# Altium PCB stm32_buck_PCB1.PcbDoc
Units mm, origin at the board's own origin, x right, y up, seen from the top; angles counter-clockwise.
Board outline 152.4 x 101.6 mm, 2 copper layers (Top Layer, Bottom Layer); 87 components, 52 nets, 386 pads, 168 vias.
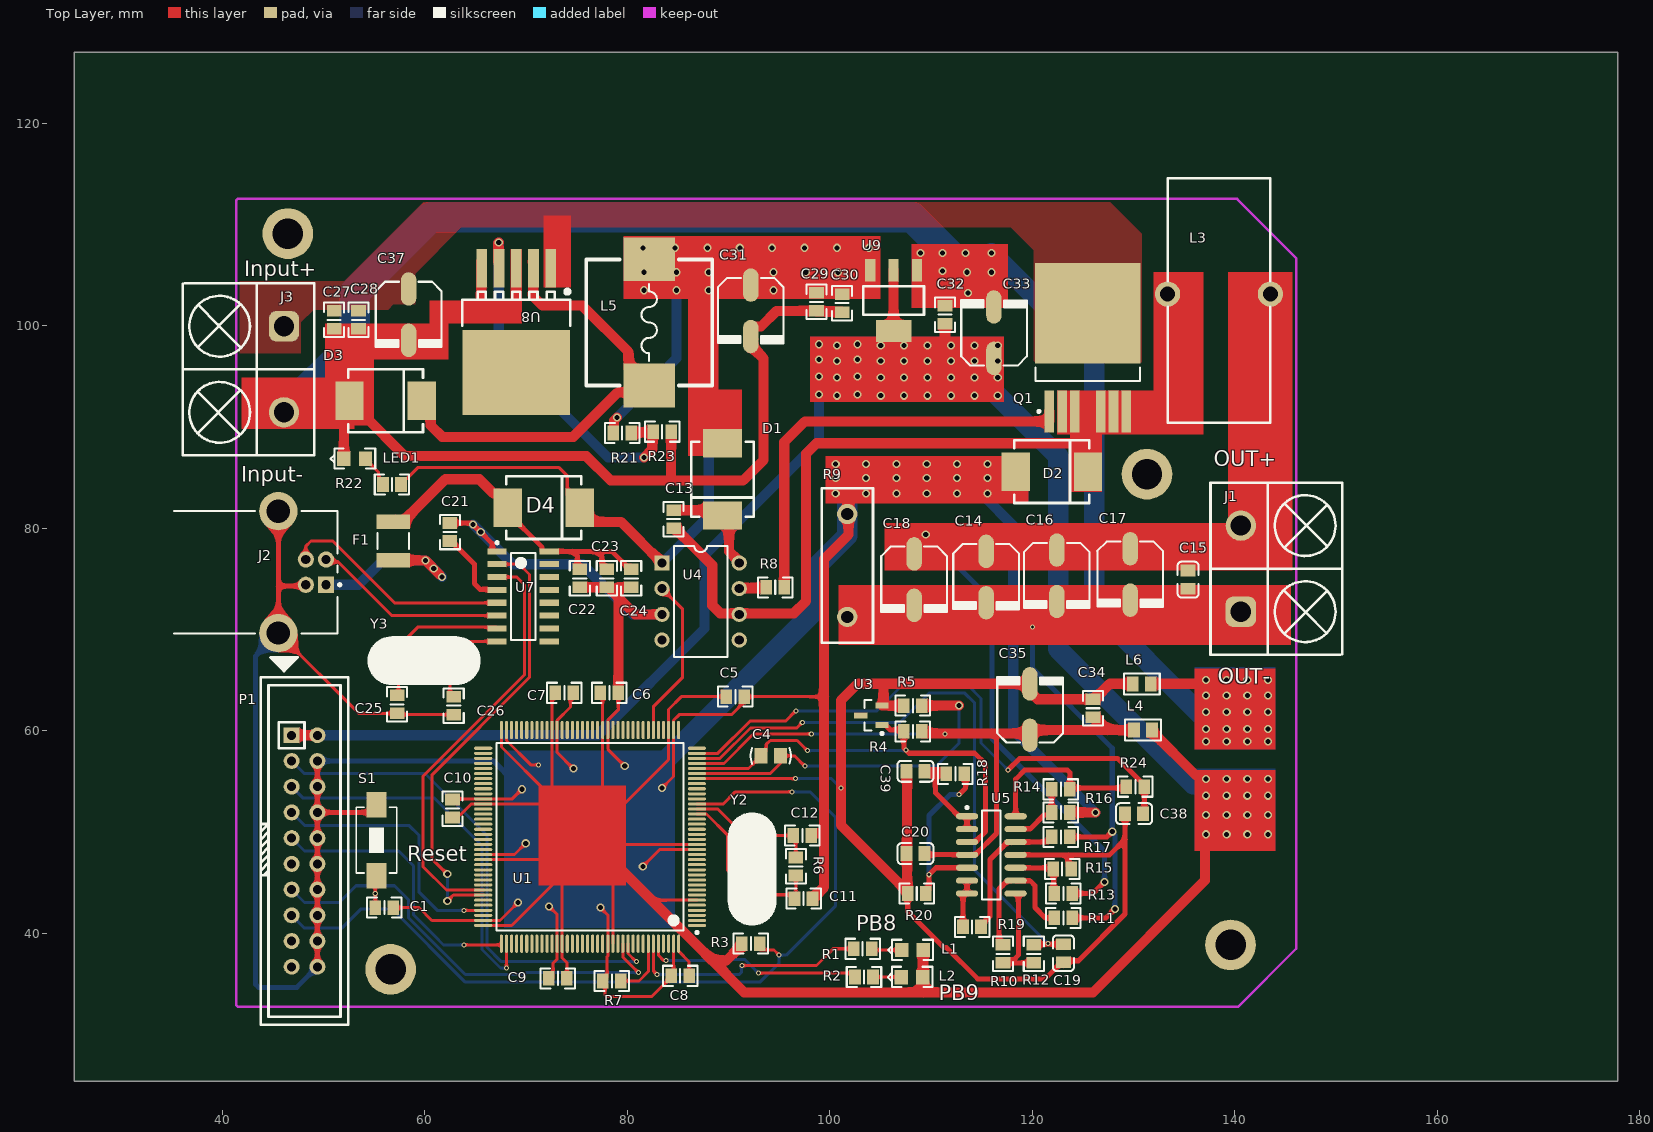
[diagram p0: Top Layer view]
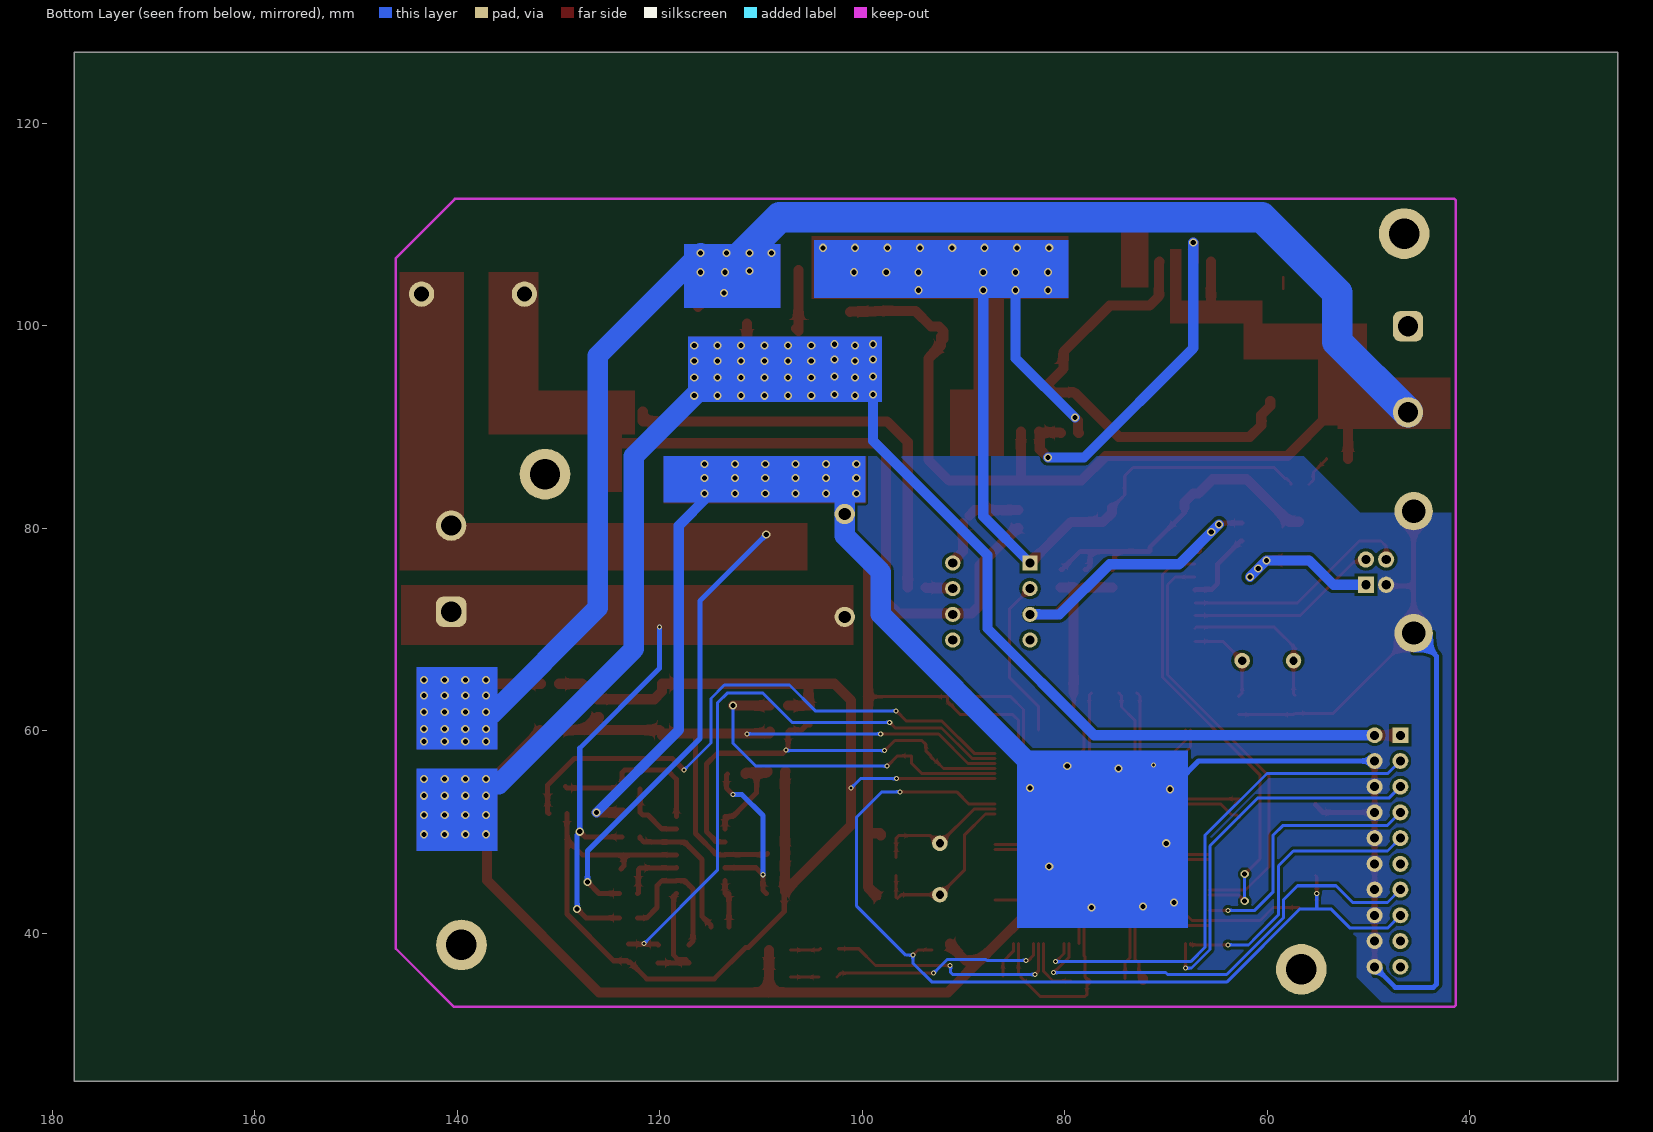
[diagram p1: Bottom Layer view, seen from below]
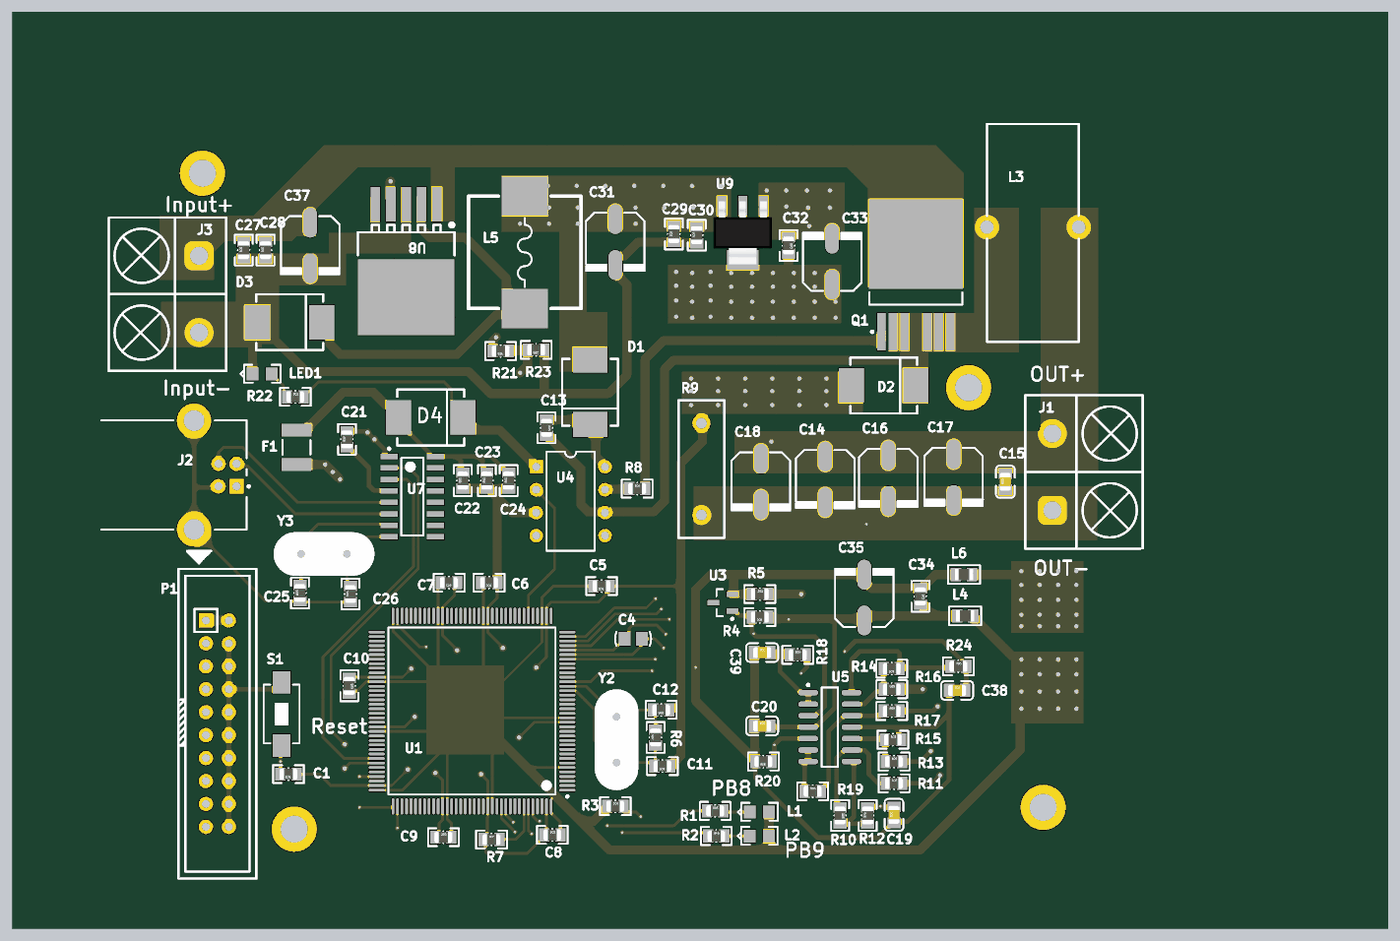
[diagram p2: 3D render of the assembled board from above, using the file's embedded part models]

## Layer stack, top to bottom
Top Solder: solder mask 0.0102, Solder Resist, Dk 3.5
Top Layer: signal copper 0.0356
Dielectric 1: dielectric 0.32, FR-4, Dk 4.8
Bottom Layer: signal copper 0.0356
Bottom Solder: solder mask 0.0102, Solder Resist, Dk 3.5

## Board outline
25.4,25.4 177.8,25.4 177.8,127 25.4,127

## Design rules (kind name [scope] priority, off if disabled: settings)
Clearance [All] p1: gap=0.2 ignorepadtopadclearanceinfootprint=FALSE
HoleSize [All] p1: absolutevalues=TRUE maxlimit=3 minlimit=0.025 maxpercent=80.000 minpercent=20.000
MinimumSolderMaskSliver [All] p1: minsoldermaskwidth=0.1
PlaneConnect [All] p1: planeconnectstyle=Direct reliefexpansion=0.508 reliefentries=4 reliefconductorwidth=0.254 reliefairgap=0.254
PolygonConnect [All] p1: connectstyle=Direct reliefconductorwidth=0.254 reliefentries=4 polygonreliefangle="90 Angle" airgapwidth=0.254
RoutingVias [All] p1: holewidth=0.711 width=1.27 viastyle="Through Hole" minholewidth=0.711 minwidth=1.27 maxholewidth=0.711 maxwidth=1.27
SolderMaskExpansion [All] p1: expansion=0.102
Width [All] p1: maxlimit=3 minlimit=0.254 preferedwidth=0.254
27 further rules are at their usual default settings.

## Classes and differential pairs
component class 辅助电源: C21 C22 C23 C24 C25 C26 C27 C28 C29 C30 C31 C32 C33 C34 C35 C37 D3 D4 F1 J2 J3 L4 L5 L6 LED1 R21 R22 R23 U7 U8 U9 Y3
component class 主电路: C13 C14 C15 C16 C17 C18 C19 C20 C38 C39 D1 D2 J1 L3 Q1 R8 R9 R10 R11 R12 R13 R14 R15 R16 R17 R18 R19 R20 R24 U4 U5
component class STM32: C1 C4 C5 C6 C7 C8 C9 C10 C11 C12 L1 L2 P1 R1 R2 R3 R4 R5 R6 R7 S1 U1 U3 Y2

## Components (designator, comment, footprint, x,y, rotation, side; value= is the part's Value field where it differs from the comment)
C1 "0.1uf" 0805R 56.007,42.545 r180 top
C4 "100nF" C-RAD-0805 94.168,57.531 r180 top
C5 "0.1uf" 0805 90.678,63.373 r180 top
C6 "0.1uf" 0805 78.232,63.754 r180 top
C7 "0.1uf" 0805 73.787,63.754 r180 top
C8 "0.1uf" 0805 85.217,35.814 r0 top
C9 "0.1uf" 0805 73.152,35.56 r0 top
C10 "0.1uf" 0805 62.738,52.324 r270 top
C11 "22pF" 0805R 97.409,43.434 r180 top
C12 "22pF" 0805R 97.282,49.657 r180 top
C13 "1uF" 0805R 84.582,80.899 r270 top
C14 "Cap Pol1" RB-220T 115.443,75.184 r270 top value=470uF
C15 "100nF" 0805_C 135.382,74.931 r90 top
C16 "Cap Pol1" RB-220T 122.428,75.311 r270 top value=470uF
C17 "Cap Pol1" RB-220T 129.667,75.438 r270 top value=470uF
C18 "Cap Pol1" RB-220T 108.331,74.93 r270 top value=470uF
C19 "33nF" 0805_C 123.063,38.04 r90 top
C20 "100nF" 0805_C 108.458,47.879 r0 top
C21 "0.1uf" 0805 62.484,79.629 r90 top
C22 "10uf" 0805 75.311,75.057 r90 top
C23 "0.1uf" 0805 77.978,75.057 r90 top
C24 "10uf" 0805 80.391,75.057 r90 top
C25 "22pF" 0805R 57.277,62.611 r90 top
C26 "22pF" 0805R 62.865,62.484 r90 top
C27 "10uf" 0805 51.054,100.584 r90 top
C28 "0.1uf" 0805 53.467,100.584 r90 top
C29 "0.1uf" 0805 98.679,102.362 r90 top
C30 "10uf" 0805 101.219,102.235 r90 top
C31 "220μF" RB-220T 92.202,101.473 r270 top
C32 "0.1uf" 0805 111.379,101.092 r270 top
C33 "Cap Pol1" RB-220T 116.205,99.314 r90 top value=470uF
C34 "0.1uf" 0805 125.984,62.23 r270 top
C35 "Cap Pol1" RB-220T 119.761,62.103 r90 top value=470uF
C37 "Cap Pol1" RB-220T 58.42,101.092 r270 top value=470uF
C38 "33nF" 0805_C 130.047,51.816 r0 top
C39 "100nF" 0805_C 108.459,56.007 r0 top
D1 "SS36" SMC(DO-214AB)_S1 89.408,84.836 r90 top
D2 "SF10A600H" SMC(DO-214AB)_S1 121.92,85.598 r180 top
D3 "SS36" SMC(DO-214AB)_S1 56.134,92.583 r180 top
D4 "SS36" SMC(DO-214AB)_S1 71.755,82.042 r180 top
F1 "500mA" 1812 56.896,78.74 r90 top
J1 "Heard2" 8.5端子 140.589,71.764 r90 top
J2 "1-1470156-2" 1-1470156 35.25,75.672 r180 top
J3 "Heard2" 8.5端子 46.101,99.949 r270 top
L1 "POWER" LED-0805 108.153,38.354 r180 top value=红色,0805
L2 "POWER" LED-0805 108.128,35.687 r180 top value=红色,0805
L3 "12uH" L_12uh 133.35,103.124 r0 top
L4 "10uH ±10%" 0805_L 130.937,60.071 r180 top
L5 "INDUCTOR1" L-12X12S 82.169,100.33 r90 top value=470uH
L6 "10uH ±10%" 0805_L 130.811,64.643 r180 top
LED1 "POWER" LED-0805 53.086,86.868 r180 top value=红色,0805
P1 "JTAG/SWD" JTAG_20 46.863,59.563 r0 top locked
Q1 "BUK6C3R3-75C" NXP-SOT427_N 125.476,97.79 r90 top
R1 "1.5k" 0805R 103.251,38.481 r0 top
R2 "1.5k" 0805R 103.378,35.687 r0 top
R3 "10K" 0805R 92.202,38.989 r0 top
R4 "4.7K" 0805R 108.204,59.944 r180 top
R5 "0Ω" 0805R 108.204,62.484 r0 top
R6 "1M" 0805R 96.647,46.609 r90 top
R7 "100k" 0805R 78.486,35.306 r0 top
R8 "100" 0805R 94.615,74.168 r0 top
R9 "0.01" 水泥电阻 101.727,81.407 r270 top
R10 "1K" 0805R 117.094,37.973 r270 top
R11 "30K" 0805R 123.063,41.529 r0 top
R12 "1K" 0805R 120.142,37.973 r90 top
R13 "30K" 0805R 123.063,43.942 r0 top
R14 "15K" 0805R 122.809,54.229 r180 top
R15 "1K" 0805R 122.936,46.355 r0 top
R16 "1K" 0805R 122.809,51.943 r0 top
R17 "1K" 0805R 122.809,49.53 r0 top
R18 "10K" 0805R 112.395,55.753 r0 top
R19 "15K" 0805R 114.046,40.64 r0 top
R20 "10K" 0805R 108.585,43.942 r180 top
R21 "30K" 0805R 79.502,89.408 r180 top
R22 "3.3K" 0805R 56.769,84.328 r0 top
R23 "4.7K" 0805R 83.439,89.535 r180 top
R24 "1K" 0805R 130.175,54.483 r0 top
S1 "SW-PB" SW_PB2_A1 55.245,49.149 r0 top
U1 "STM32F103ZET6" STM-LQFP144_N 76.327,49.53 r180 top
U3 "LM385M3-2.5" MF03A_N 104.106,61.534 r180 top
U4 "IR2117" PDIP8 87.249,72.771 r270 top
U5 "TLV2374IDR" TI-D14_N 115.951,47.752 r0 top
U7 "CH340" SOIC-16 69.723,73.279 r0 top
U8 "LM2596S" TO-263-5 69.039,105.664 r90 top
U9 "AMS1117-3.3" SOT-223 106.299,102.489 r90 top
Y2 "8M" 晶振 92.329,46.355 r90 top
Y3 "12M" 晶振 59.944,66.929 r0 top

## Footprints (in the part's own frame and the unit in brackets; to place one, negate y for a bottom-side part, rotate by r counter-clockwise, add the part's x,y. Pads: shape width x height; smd on the part's side, far side on the other; paste and mask are expansions set on the pad)
1-1470156 [mm] "Connector; USB1.1, Type B, Thru-Hole; 4 Position; Right Angle"
  rect 1.6x1.6 hole 0.92: 1(-15.01,1.25)
  round 1.6 hole 0.92: 2(-15.01,-1.25) 3(-13.01,-1.25) 4(-13.01,1.25)
  round 3.8 hole 2.3: 5(-10.3,6.02) 6(-10.3,-6.02)
  silkscreen extent -16.49,-6.05 -0.02,6.05
8.5端子 [mm]
  rrect50% 3x3 hole 2: 1(0,0)
  round 3 hole 2: 2(8.5,0)
  silkscreen extent -4.25,-10 12.75,3
0805 [mm]
  rect 1.15x1.45 smd: 1(-0.889,0) 2(0.889,0)
  silkscreen extent -1.7,-0.99 1.7,0.99, body extent -1,-0.63 1,0.63, height 0.78
0805_C [mm]
  rect 1.16x1.47 smd: 1(-0.89,0) 2(0.89,0)
  silkscreen extent -1.77,-1.04 1.77,1.04, body extent -1,-0.62 1,0.63, height 0.77
0805_L [mm]
  rect 1.16x1.47 smd: 1(-0.89,0) 2(0.89,0)
  silkscreen extent -1.77,-1.04 1.77,1.03, body extent -1.02,-0.64 1.03,0.64, height 0.6
0805R [mm]
  rect 1.15x1.45 smd: 1(-0.889,0) 2(0.889,0)
  silkscreen extent -1.7,-0.99 1.7,0.99, body extent -1,-0.63 1,0.63, height 0.78
1812 [mm] "Chip Capacitor, Body 4.5x3.2mm, IPC High Density"
  rect 1.4x3.3 smd: 1(-1.9,0) 2(1.9,0)
  silkscreen extent -0.8,-1.55 0.8,1.55, body extent -2.4,-1.7 2.4,1.7, height 1.4
C-RAD-0805 [mm] "贴片电容"
  rect 1.3x1.5 smd: 1(-0.95,0) 2(0.95,0)
  silkscreen extent -2,-0.79 2,0.79, body extent -1.27,-0.64 1.27,0.64, height 0.9
JTAG_20 [mm]
  rect 1.575x1.575 hole 0.889: 1(0,0)
  round 1.575 hole 0.889: 2(2.54,0) 3(0,-2.54) 4(2.54,-2.54) 5(0,-5.08) 6(2.54,-5.08) 7(0,-7.62) 8(2.54,-7.62) 9(0,-10.16) 10(2.54,-10.16) 11(0,-12.7) 12(2.54,-12.7) 13(0,-15.24) 14(2.54,-15.24) 15(0,-17.78) 16(2.54,-17.78) 17(0,-20.32) 18(2.54,-20.32) 19(0,-22.86) 20(2.54,-22.86)
  silkscreen extent -3.05,-28.57 5.59,7.69
L-12X12S [mil]
  rect 170x200 smd: 1(-245,0) 2(245,0)
  Top Layer pour cut-out: -245.5,-245 -245.5,247 245.5,247 245.5,-245
  silkscreen extent -245,-245 245,245
L_12uh [mm] "24*9.5mm"
  round 2.5 hole 1.5: 1(0,0) 2(10.16,0)
  silkscreen extent 0,-12.7 10.16,11.43
LED-0805 [mil]
  rect 52x56 smd: 1(-42,0) 2(42,0)
  silkscreen extent -80,-40 94,38, body extent -60,-25 60,25, height 50
MF03A_N [mm] "SOT23, 3-Leads, Body 2.9x1.3mm, Pitch 0.95mm, Lead Span 2.4mm, IPC Medium Density"
  rect 1.3x0.6 smd: 1(-1.05,0.95) 2(-1.05,-0.95) 3(1.05,0)
  silkscreen extent -1.18,-1.5 0.7,1.92, body extent -0.7,-1.5 0.7,1.5, height 1.12
NXP-SOT427_N [mm] "D2-PAK, 7-Leads, Body 9.80x10.30mm, IPC Medium Density"
  rect 4.15x0.95 smd: 1(-6.25,3.81) 2(-6.25,2.54) 3(-6.25,1.27) 5(-6.25,-1.27) 6(-6.25,-2.54) 7(-6.25,-3.81)
  rect 9.9x10.4 smd: 8(3.45,0)
  silkscreen extent -6.37,-5.15 -1.9,5.15, body extent -3.25,-5.15 6.55,5.15, height 4.5
PDIP8 [mm] "DIP; 8 Leads; Row Spacing 7.62 mm; Pitch 2.54 mm"
  rect 1.5x1.5 hole 0.9: 1(-3.81,-3.81)
  round 1.5 hole 0.9: 2(-1.27,-3.81) 3(1.27,-3.81) 4(3.81,-3.81) 5(3.81,3.81) 6(1.27,3.81) 7(-1.27,3.81) 8(-3.81,3.81)
  silkscreen extent -5.5,-2.65 5.5,2.65
RB-220T [mil]
  oval 130x60 smd: 1(-100,0) 2(100,0)
  silkscreen extent -128,-128 126,127
SMC(DO-214AB)_S1 [mil]
  rect 110x150 smd: 1(140.49,0) 2(-140.49,0)
  silkscreen extent -146,-122 146,122
SOIC-16 [mm] "USB转串口"
  rect 1.9x0.6 smd: 1(-2.575,4.445) 2(-2.575,3.175) 3(-2.575,1.905) 4(-2.575,0.635) 5(-2.575,-0.635) 6(-2.575,-1.905) 7(-2.575,-3.175) 8(-2.575,-4.445) 9(2.575,-4.445) 10(2.575,-3.175) 11(2.575,-1.905) 12(2.575,-0.635) 13(2.575,0.635) 14(2.575,1.905) 15(2.575,3.175) 16(2.575,4.445)
  silkscreen extent -2.7,-4.3 1.22,5.42, body extent -1.98,-4.28 1.97,4.28, height 1.7
SOT-223 [mm]
  rect 2.2x1 smd: 1(3,-2.3) 2(3,0) 3(3,2.3)
  rect 2.2x3.5 smd: 2(-3,0)
  silkscreen extent -1.4,-3 1.4,3, body extent -3.49,-3.24 3.49,3.24, height 1.64
STM-LQFP144_N [mm] "Thin QFP, 144-Leads, Body 20x20mm, Pitch 0.5mm, IPC Medium Density"
  oval 1.8x0.3 smd: 1(-10.55,8.75) 2(-10.55,8.25) 3(-10.55,7.75) 4(-10.55,7.25) 5(-10.55,6.75) 6(-10.55,6.25) 7(-10.55,5.75) 8(-10.55,5.25) 9(-10.55,4.75) 10(-10.55,4.25) 11(-10.55,3.75) 12(-10.55,3.25) 13(-10.55,2.75) 14(-10.55,2.25) 15(-10.55,1.75) 16(-10.55,1.25) 17(-10.55,0.75) 18(-10.55,0.25) 19(-10.55,-0.25) 20(-10.55,-0.75) 21(-10.55,-1.25) 22(-10.55,-1.75) 23(-10.55,-2.25) 24(-10.55,-2.75) 25(-10.55,-3.25) 26(-10.55,-3.75) 27(-10.55,-4.25) 28(-10.55,-4.75) 29(-10.55,-5.25) 30(-10.55,-5.75) 31(-10.55,-6.25) 32(-10.55,-6.75) 33(-10.55,-7.25) 34(-10.55,-7.75) 35(-10.55,-8.25) 36(-10.55,-8.75) 73(10.55,-8.75) 74(10.55,-8.25) 75(10.55,-7.75) 76(10.55,-7.25) 77(10.55,-6.75) 78(10.55,-6.25) 79(10.55,-5.75) 80(10.55,-5.25) 81(10.55,-4.75) 82(10.55,-4.25) 83(10.55,-3.75) 84(10.55,-3.25) 85(10.55,-2.75) 86(10.55,-2.25) 87(10.55,-1.75) 88(10.55,-1.25) 89(10.55,-0.75) 90(10.55,-0.25) 91(10.55,0.25) 92(10.55,0.75) 93(10.55,1.25) 94(10.55,1.75) 95(10.55,2.25) 96(10.55,2.75) 97(10.55,3.25) 98(10.55,3.75) 99(10.55,4.25) 100(10.55,4.75) 101(10.55,5.25) 102(10.55,5.75) 103(10.55,6.25) 104(10.55,6.75) 105(10.55,7.25) 106(10.55,7.75) 107(10.55,8.25) 108(10.55,8.75)
  oval 0.3x1.8 smd: 37(-8.75,-10.55) 38(-8.25,-10.55) 39(-7.75,-10.55) 40(-7.25,-10.55) 41(-6.75,-10.55) 42(-6.25,-10.55) 43(-5.75,-10.55) 44(-5.25,-10.55) 45(-4.75,-10.55) 46(-4.25,-10.55) 47(-3.75,-10.55) 48(-3.25,-10.55) 49(-2.75,-10.55) 50(-2.25,-10.55) 51(-1.75,-10.55) 52(-1.25,-10.55) 53(-0.75,-10.55) 54(-0.25,-10.55) 55(0.25,-10.55) 56(0.75,-10.55) 57(1.25,-10.55) 58(1.75,-10.55) 59(2.25,-10.55) 60(2.75,-10.55) 61(3.25,-10.55) 62(3.75,-10.55) 63(4.25,-10.55) 64(4.75,-10.55) 65(5.25,-10.55) 66(5.75,-10.55) 67(6.25,-10.55) 68(6.75,-10.55) 69(7.25,-10.55) 70(7.75,-10.55) 71(8.25,-10.55) 72(8.75,-10.55) 109(8.75,10.55) 110(8.25,10.55) 111(7.75,10.55) 112(7.25,10.55) 113(6.75,10.55) 114(6.25,10.55) 115(5.75,10.55) 116(5.25,10.55) 117(4.75,10.55) 118(4.25,10.55) 119(3.75,10.55) 120(3.25,10.55) 121(2.75,10.55) 122(2.25,10.55) 123(1.75,10.55) 124(1.25,10.55) 125(0.75,10.55) 126(0.25,10.55) 127(-0.25,10.55) 128(-0.75,10.55) 129(-1.25,10.55) 130(-1.75,10.55) 131(-2.25,10.55) 132(-2.75,10.55) 133(-3.25,10.55) 134(-3.75,10.55) 135(-4.25,10.55) 136(-4.75,10.55) 137(-5.25,10.55) 138(-5.75,10.55) 139(-6.25,10.55) 140(-6.75,10.55) 141(-7.25,10.55) 142(-7.75,10.55) 143(-8.25,10.55) 144(-8.75,10.55)
  silkscreen extent -10.68,-9.25 9.25,9.57, body extent -10,-10 10,10, height 1.6
SW_PB2_A1 [mm]
  rect 2x2.5 smd: 1(0,3.556) 2(0,-3.444)
  silkscreen extent -2,-3.19 2,3.31, body extent -2.03,-3.17 2.03,3.3, height 1.2
TI-D14_N [mm] "SOIC, 14-Leads, Body 8.65x3.9mm, Pitch 1.27mm, IPC Medium Density"
  oval 2.2x0.6 smd: 1(-2.4,3.81) 2(-2.4,2.54) 3(-2.4,1.27) 4(-2.4,0) 5(-2.4,-1.27) 6(-2.4,-2.54) 7(-2.4,-3.81) 8(2.4,-3.81) 9(2.4,-2.54) 10(2.4,-1.27) 11(2.4,0) 12(2.4,1.27) 13(2.4,2.54) 14(2.4,3.81)
  silkscreen extent -2.52,-4.4 0.9,4.78, body extent -2,-4.38 2,4.38, height 1.75
TO-263-5 [mm]
  rect 8.4x10.65 smd: 0(-10.3,0)
  rect 3.8x1.05 smd: 1(0,-3.4) 2(0,-1.7) 3(0,0) 4(0,1.7) 5(0,3.4)
  silkscreen extent -5.65,-5.35 -2.1,5.35
晶振 [mil]
  round 60 hole 32: 1(-100,0) 2(100,0)
  silkscreen extent -215,-90 215,90
水泥电阻 [mm] "0.22R_14mm*18mm"
  round 2 hole 1.2: 1(0,0) 2(10.16,0)
  silkscreen extent -2.54,-2.54 12.7,2.54

## Part data
C1 C11 C12 C13 C25 C26: library part Cap, "Capacitor", LatestRevisionDate=17-Jul-2002, LatestRevisionNote="Re-released for DXP Platform.", PackageDescription="Radial Cap, Thru-Hole; 2 Leads; 0.3 in Pin Spacing", PackageReference=RAD-0.3, Published=8-Jun-2000, Publisher="Altium Limited"
C4: library part Cap, "无极性电容", LatestRevisionDate=17-Jul-2002, LatestRevisionNote="Re-released for DXP Platform.", PackageReference=RAD-0.3, Published=8-Jun-2000, Publisher="Altium Limited"
C5 C6 C7 C8 C9 C10 C21 C22 C23 C24 C27 C28 C29 C30 C32 C34: "Capacitor", ComponentLink1Description=ErpDataInfo, ComponentLink1URL=http://192.168.0.2:8012/ErpExt/ErpData/ListMateriel.aspx?pkey=1.02.01.0032, RoHS=RoHS, 名称=电容, 封装=0603, 物料代码=1.02.01.0032, 现有库存=1572305, 规格型号=104,±10%,50V,X7R,0603,*,RoHS, 设备封装名称=C0603_104_X7R_50V_10%, 贴片和直插=SMT
C14 C16 C17 C18 C33 C35 C37: "Polarized Capacitor (Radial)", LatestRevisionDate=17-Jul-2002, LatestRevisionNote="Re-released for DXP Platform.", PackageDescription="Polarized Capacitor (Radial); 2 Leads", PackageReference=RB7.6-15, Published=8-Jun-2000, Publisher="Altium Limited"
C15 C19 C20 C38 C39: library part "0805 100nF(104) 10% 50V", "贴片电容", Package=0805, SuppliersPartNumber=C49678, ComponentLink1Description=供应商链接, ComponentLink1URL=http://www.szlcsc.com/product/details_50686.html, Supplier=LC
C31: "Electrolytic Capacitor", ComponentLink1Description=ErpDataInfo, ComponentLink1URL=http://192.168.0.2:8012/ErpExt/ErpData/ListMateriel.aspx?pkey=1.02.06.0002, RoHS=RoHS, 厂商=珠海华冠, 名称=V型铝电解电容, 物料代码=1.02.06.0002, 现有库存=4627, 规格型号=220μF,16V,Ф6.3×7.7mm,,珠海华冠,RoHS, 贴片和直插=SMT
D1 D2 D3 D4: library part "SMC(DO-214AB) SS36-E3/57T", "二极管", Package=SMC(DO-214AB), SuppliersPartNumber=C35722, ComponentLink1URL=http://www.szlcsc.com/product/details_36698.html, Supplier=LC
  D1 D2 D3: ComponentLink1Description=供应商链接
  D4: ComponentLink1Description=供应商
F1: library part "Fuse 1", "Fuse", LatestRevisionDate=17-Jul-2002, LatestRevisionNote="Re-released for DXP Platform.", PackageDescription="Thru-Hole; 2 Leads", PackageReference=PIN-W2/E2.8, Published=8-Jun-2000, Publisher="Altium Limited"
J1 J3: library part Header2
J2: "USB 1.1, Right Angle, Thru-Hole, B Type, Receptacle, 4 Position, Black", PackageDocument=02-Jun-2001, ComponentLink1Description="Manufacturer Link", ComponentLink1URL=http://www.tycoelectronics.com/, ComponentLink2Description="Packaging Specification", ComponentLink2URL=http://ecommas.tycoelectronics.com/commerce/DocumentDelivery/DDEController?Action=showdoc&DocId=Customer+Drawing%7F1470156%7FO%7Ftif%7FEnglish%7FC_1470156_O.tif, ContactMaterial="Phosphor Bronze", ContactPlating="Gold over Nickel", DatasheetDocument=02-Jun-2001, DrillSize="Corresponds to nominal value.", HousingMaterial="Glass-Filled Thermoplastic", PackageReference=1-1470156, PanelGround=Without, PCB_Layout="Complies with manufacturer's recommendation.", Published=15-Jul-2004, Publisher="Altium Limited", TerminationLength="3.00mm [0.118in.]"
L3: library part L_12uh
L4 L6: library part "0805 10uH 10%", "贴片电感", Package=0805, SuppliersPartNumber=C1046, ComponentLink1Description=供应商链接, ComponentLink1URL=http://www.szlcsc.com/product/details_1398.html, Supplier=LC
P1: library part "Header 10X2", "Header, 10-Pin, Dual row", LatestRevisionDate=17-Jul-2002, LatestRevisionNote="Re-released for DXP Platform.", Publisher="Altium Limited"
Q1: library part BUK6C3R3-75C,118, "N-Channel TrenchMOS Intermediate Level FET, 75 V, 181 A, 7-Pin SOT427, Tape and Reel", Manufacturer="NXP Semiconductors", Supplier Part Number 1=568-9503-2-ND, Automotive Qualified=Y, Channel Type=N, ComponentLink1Description="Manufacturer URL", ComponentLink1URL=http://www.nxp.com/, ComponentLink2Description=Datasheet, ComponentLink2URL=http://www.nxp.com/documents/data_sheet/BUK6C3R3-75C.pdf, ComponentLink3Description="Package Specification", ComponentLink3URL=http://www.nxp.com/documents/outline_drawing/sot427_po.pdf, DatasheetVersion="Rev. 3", ID [max] (A)=181, IDM [max] (A)=723, Mounting Technology="Surface Mount", PackageDescription="7-Pin Plastic Single-ended Surface Mounted Package, Body 10 x 9.6 mm, Pitch 1.27 mm", PackageReference=SOT427, PackageVersion="12-10-16, 10/2012", Packing="Tape & Reel", PartNumber=BUK6C3R3-75C,118, Qr [typ] (nC)=165, Supplier 1=Digi-Key, Supplier 2=Digi-Key, Supplier 3=Digi-Key, Supplier 4=Mouser, Supplier Part Number 2=568-9503-1-ND, Supplier Part Number 3=568-9503-6-ND, Supplier Part Number 4=771-BUK6C3R3-75C,118, VDS [max] (V)=75, VGSth [typ] (V)=2.3
R1 R2 R3 R4 R6 R8 R10 R11 R12 R13 R14 R15 R16 R17 R18 R19 R20 R21 R22 R23 R24: library part Res2, "Resistor", LatestRevisionDate=17-Jul-2002, LatestRevisionNote="Re-released for DXP Platform.", PackageDescription="Axial Device, Thru-Hole; 2 Leads; 0.4 in Pin Spacing", PackageReference=AXIAL-0.4, Published=8-Jun-2000, Publisher="Altium Limited"
R9: library part 水泥电阻
S1: "Switch", LatestRevisionDate=17-Jul-2002, LatestRevisionNote="Re-released for DXP Platform.", PackageDescription="Switch; 2 Leads", PackageReference=SPST-2, Published=24-Mar-1999, Publisher="Altium Limited"
U1: "ARM Cortex-M3 32-bit MCU, 512 KB Flash, 64 KB Internal RAM, 112 I/Os, 144-pin LQFP, -40 to 85 degC, Tray", I/Os (High Current)=112, Operating Frequency(F) (Processor speed) (MHz)=72, Supplier Part Number 1=497-6442-ND, Supply Voltage(Vcc) min (V)=2, A/D Converter="3x12-bit (21 Channel)", ComponentLink1Description="Manufacturer URL", ComponentLink1URL=http://www.st.com/web/en/home.html, ComponentLink2Description=Datasheet, ComponentLink2URL=http://www.st.com/st-web-ui/static/active/en/resource/technical/document/datasheet/CD00191185.pdf, ComponentLink3Description="Package Specification", ComponentLink3URL=http://www.st.com/st-web-ui/static/active/en/resource/technical/document/datasheet/DM00037051.pdf, Core="ARM Cortex-M3", D/A Converter="2x12-bit (2 Channel)", DatasheetVersion="Rev. 8", FLASH Size (Prog) (kB)=512, Internal RAM Size (kB)=64, Mounting Technology="Surface Mount", PackageDescription="144-Pin Low Profile Quad Flat Package, 20 x 20 mm Body, 0.5 mm Pitch", PackageReference=LQFP144, PackageVersion="Rev. 4, 06/2013", Packing=Tray, PartNumber=STM32F103ZET6, Supplier 1=Digi-Key, Supplier 2=Farnell, Supplier 3=Newark, Supplier 4=Mouser, Supplier Part Number 2=1624145, Supplier Part Number 3=57P1270, Supplier Part Number 4=511-STM32F103ZET6
U3: "Micropower Voltage Reference Diode, 3-pin SOT-23", Manufacturer="National Semiconductor", PackageTopMarking=R12*XTT, PowerWise=N, Supplier Part Number 1=9778160RL, ComponentLink1Description="LM385-2.5 Datasheet", ComponentLink1URL=http://www.national.com/ds/LM/LM385-2.5.pdf, ComponentLink2Description="LM385-2.5 Web Page", ComponentLink2URL=http://www.national.com/pf/LM/LM385-2.5.html, ComponentLink3Description="MF03A Package Page", ComponentLink3URL=http://www.national.com/packaging/folders/mf03a.html, CompType="Voltage Reference IC", DatasheetVersion=Jan-2008, PackageDescription="Molded SOT-23, .115 x .051 x .037in Body, 3 Lead, .075 in Pitch", PackageReference=MF03A, PackageVersion="revB, Mar-2003", PartNumber=LM385M3-2.5, PinCount=3, Published=4-Dec-2008, Publisher="Altium Limited", RoHS=N, Supplier 1=Farnell, Supplier 2=Farnell, Supplier Part Number 2=9778160
U4: "Single Channel Driver", Code_JEDEC=MO-001-AN, ComponentLink1Description="Manufacturer Link", ComponentLink1URL=http://www.irf.com/, ComponentLink2Description=Datasheet, ComponentLink2URL=http://www.irf.com/product-info/datasheets/data/ir2117.pdf, DatasheetVersion=PD60146I, LatestRevisionDate=04-Mar-2005, LatestRevisionNote="Stylized 3D Model Added.", Note="Pins 4 and 5 not connected (NC).", PackageDescription="DIP; 8 Leads; Row Spacing 7.62 mm; Pitch 2.54 mm", PackageReference=PDIP8, Published=8-Jun-2000, Publisher="Altium Limited"
U5: "550 uA/Ch, 3 MHz, RRIO Operational Amplifier, 2.7 to 16 V, -40 to 125 degC, 14-pin SOIC (D14), Green (RoHS & no Sb/Br)", Manufacturer="Texas Instruments", Rating=Catalog, Supplier Part Number 1=296-11967-2-ND, Total Supply Voltage(Max)(+5V is 5, +/-5V is 10)=16, Total Supply Voltage(Min)(+5V is 5, +/-5V is 10)=2.7, CMRR(Min)(dB)=50, Code_JEDEC=MS-012, ComponentLink1Description="Manufacturer URL", ComponentLink1URL=http://www.ti.com/, ComponentLink2Description=Datasheet, ComponentLink2URL=http://www.ti.com/lit/ds/symlink/tlv2374.pdf, ComponentLink3Description="Package Specification", ComponentLink3URL=http://www.ti.com/lit/ml/mpds177g/mpds177g.pdf, DatasheetVersion=SLOS270D, Eco-Plan="Green (RoHS & no Sb/Br)", GBW(Typ)(MHz)=3, IIB(Max)(pA)=60, Iq per channel(Max)(mA)=0.66, Mounting Technology="Surface Mount", Number of Channels=4, Offset Drift(Typ)(uV/C)=2, PackageDescription="14-Pin Plastic Small Outline, Body 8.65 x 3.9 mm, Pitch 1.27 mm", PackageReference=D14, PackageVersion="4040047-5/M, 06/2011", Packing="LARGE T&R", PartNumber=TLV2374IDR, Slew Rate(Typ)(V/us)=2.4, Sub Family="Low Supply Voltage Amplifier (<=2.7V), Precision Amplifier", Supplier 1=Digi-Key, Supplier 2=Digi-Key, Supplier 3=Digi-Key, Supplier 4=Farnell, Supplier 5=Newark, Supplier 6=Mouser, Supplier Part Number 2=296-11967-1-ND, Supplier Part Number 3=296-11967-6-ND, Supplier Part Number 4=1535749, Supplier Part Number 5=76C7983, Supplier Part Number 6=595-TLV2374IDR, Vio (25C)(Max)(mV)=4.5
U7: "USB转串口"
U8: library part LM2596SX-5.0/NOPB_[C10002], "DC-DCоƬ", Package=TO-263-5, SuppliersPartNumber=C10002, ComponentLink1Description=供应商链接, ComponentLink1URL=http://www.szlcsc.com/product/details_10538.html, Supplier=LC
U9: library part "SOT-223 AMS1117-3.3", "低压差线性稳压(LDO)", Package=SOT-223, SuppliersPartNumber=C6186, ComponentLink1Description=供应商链接, ComponentLink1URL=http://www.szlcsc.com/product/details_6652.html, Supplier=LC
Y2: library part XTAL, "Crystal Oscillator", LatestRevisionDate=17-Jul-2002, LatestRevisionNote="Re-released for DXP Platform.", PackageDescription="Crystal, Thru-Hole; 2 Leads; Body 3.1 x 8.2 mm (Dia.xH)", PackageReference=R38, Published=8-Jun-2000, Publisher="Altium Limited"
Y3: library part 晶振
L1 L2 LED1: ComponentLink1Description=ErpDataInfo, ComponentLink1URL=http://192.168.0.2:8012/ErpExt/ErpData/ListMateriel.aspx?pkey=1.04.05.0001, RoHS=RoHS, 名称=发光二极管, 器件优选方案=优先选用, 封装=0805, 物料代码=1.04.05.0001, 现有库存=41928, 规格型号=红色,0805,0805,RoHS, 设备封装名称=LED0805-RED, 贴片和直插=SMT
L5: ComponentLink1Description=ErpDataInfo, ComponentLink1URL=http://192.168.0.2:8012/ErpExt/ErpData/ListMateriel.aspx?pkey=1.03.01.0049, 名称=µ, 物料代码=1.03.01.0, 规格型号=SPRH125-3
R5 R7: ComponentLink1Description=ErpDataInfo, ComponentLink1URL=http://192.168.0.2:8012/ErpExt/ErpData/ListMateriel.aspx?pkey=1.01.02.0001, RoHS=RoHS, 名称=电阻, 封装=0805, 物料代码=1.01.02.0001, 现有库存=251744, 规格型号=0Ω,0805,*,RoHS, 设备封装名称=R0805_0R, 贴片和直插=SMT

## Free pads (board coordinates)
  round 5 hole 3: 181(46.482,109.093) 181(56.642,36.449) 181(131.318,85.344) 181(139.573,38.862)

## Via types
v1: diameter 0.8, hole 0.5, Top Layer to Bottom Layer, tented both sides, 141 vias
v2: diameter 0.5, hole 0.3, Top Layer to Bottom Layer, tented both sides, 27 vias

## Nets (pads, with @x,y where several pads share a name; then routed paths per layer and width w, separated by ;. In a path a pad name is that pad's centre, name@x,y a point inside that pad or via, vN(x,y) a via of type N, cw(c..) or ccw(c..) an arc to the next point about the centre after c; other vN are vias at no path point)
3.3V: C5.2 C6.2 C7.2 C8.2 C9.2 C10.2 C32.2 C33.1 L1.1 L2.1 L4.1 P1.1 P1.2 R3.1 U1.6 U1.17 U1.39 U1.52 U1.62 U1.72 U1.84 U1.95 U1.108 U1.121 U1.131 U1.144 U9.2 | length 363.2
  Top Layer w0.3: C10.2 62.992,51.689 63.5,51.689 64.591,52.78 U1.84 73.229,52.78 ; U1.108 68.593,40.78 74.93,47.117 75.057,47.117 75.22,47.28 ; U1.95 75.22,47.28 ; U1.72 67.577,58.407 72.136,53.848 72.577,53.848 ; 72.577,53.432 72.577,53.848 ; 72.644,53.848 72.577,53.848 ; C7.2 72.577,63.433 U1.62 72.577,53.848 ; 73.577,45.637 U1.121 73.577,37.577 74.041,37.113 C9.2 ; 75.768,50.241 77.577,52.05 U1.52 77.577,63.52 C6.2 ; 76.2,48.768 76.212,48.78 76.925,48.78 U1.17 ; 76.2,49.276 84.077,57.153 U1.39 84.077,62.106 85.344,63.373 C5.2 89.789,63.523 C5.2@89.364,63.948 ; U1.131 78.577,45.629 76.073,48.133 75.22,47.28 ; 82.425,43.28 U1.6 ; U1.144 85.077,38.23 86.106,37.201 C8.2
  Top Layer w1: P1.1 P1.2 ; 72.577,53.432 73.229,52.78 75.768,50.241 76.2,49.809 76.2,49.276 76.2,48.895 ; 75.692,48.895 76.2,48.895 ; 76.2,48.768 76.2,48.895 ; R3.1 91.313,38.839 89.799,37.325 88.379,37.325 ; U9.2@106.299,105.489 106.299,99.489 U9.2@106.529,99.719 ; L1.1 109.207,38.341 109.207,35.7 L2.1 109.22,35.662 109.22,34.163 ; 111.125,97.536 111.379,97.79 C32.2 ; C33.1@115.975,96.544 C33.1 ; L4.1 131.827,59.916 136.109,55.634 136.771,55.634 v1(137.16,55.245) ; 137.033,50.165 137.033,45.212 125.984,34.163 109.22,34.163 ; 76.2,48.895 76.81,48.895 76.925,48.78 82.425,43.28 88.379,37.325 ; 88.379,37.325 91.542,34.163 109.22,34.163
  Bottom Layer w1: P1.2 77.089,59.563 87.63,70.104 87.63,77.343 98.933,88.646 v1(98.933,93.218) ; v1(137.16,53.594) 137.033,53.594 135.89,54.737 140.589,54.737
  Bottom Layer w2: v1(116.586,93.091) 122.555,87.122 122.555,68.072 135.89,54.737
  other v1: 137.16,49.784 139.192,49.784 141.224,49.784 143.256,49.784 137.16,51.689 139.192,51.689 141.224,51.689 143.256,51.689 139.192,53.594 141.224,53.594 143.256,53.594 139.192,55.245 141.224,55.245 143.256,55.245 100.711,93.091 105.029,93.091 107.34,93.091 109.652,93.091 111.963,93.091 114.275,93.091 102.743,93.218 100.711,94.869 105.029,94.869 107.34,94.869 109.652,94.869 111.963,94.869 114.275,94.869 116.586,94.869 98.933,94.996 102.743,94.996 100.711,96.52 105.029,96.52 107.34,96.52 109.652,96.52 111.963,96.52 114.275,96.52 116.586,96.52 98.933,96.647 102.743,96.647 100.711,98.044 105.029,98.044 107.34,98.044 109.652,98.044 111.963,98.044 114.275,98.044 116.586,98.044 98.933,98.171 102.743,98.171
5V: C22.2 C23.2 C24.2 D4.1 F1.2 U7.16 | length 34.1
  Top Layer w0.5: D4.1 68.186,81.534 71.598,78.123 71.598,77.774 71.648,77.724 U7.16 74.63,77.724 ; C22.2 75.083,76.174 75.083,77.271 74.63,77.724 ; C23.2 77.828,75.946 77.503,76.271 77.503,77.183 76.962,77.724 ; C24.2 80.241,75.946 78.463,77.724 76.962,77.724 ; 74.63,77.724 76.962,77.724
  Top Layer w1: F1.2 57.846,80.64 62.042,84.836 65.392,84.836 66.781,83.447 67.289,83.447 68.186,82.55 D4.1
10V: C29.2 C30.2 C31.1 D1.1 D4.2 L5.2 R21.2 R22.2 U4.1 U9.3 | length 79.7
  Top Layer w0.3: R22.2 57.658,84.478 58.083,84.903 58.233,84.903 59.309,85.979 73.279,85.979 74.076,85.182 74.076,83.289 D4.2
  Top Layer w1: D4.2 75.323,81.534 76.22,80.637 79.383,80.637 U4.1 ; R21.2 78.688,89.483 78.688,90.626 v1(78.994,90.932) ; D1.1@88.9,88.278 D1.1@89.408,88.278
  Bottom Layer w1: v1(78.994,90.932) 84.854,96.792 v1(84.854,103.505) ; U4.1 88.047,81.189 v1(88.047,103.505) v1(88.047,105.283)
  other v1: 81.661,103.505 94.434,103.505 81.661,105.283 84.854,105.283 94.434,105.283 97.627,105.283 100.82,105.283 81.534,107.696 84.727,107.696 87.92,107.696 91.113,107.696 94.307,107.696 97.5,107.696 100.693,107.696 103.886,107.696
A3V3: C20.2 C34.2 C35.1 L4.2 R4.1 U1.33 U5.4 | length 67.3
  Top Layer w0.3: U1.33 89.546,56.78 92.456,59.69 v2(98.171,59.69)
  Top Layer w0.5: C20.2 109.456,47.771 113.532,47.771 U5.4 114.351,47.752 116.459,49.86 116.459,59.245 115.951,59.753
  Top Layer w1: R4.1 109.093,59.828 109.168,59.753 115.951,59.753 119.57,59.753 C35.1 119.761,59.829 120.003,60.071 127.404,60.071 ; C34.2 126.134,61.341 127.404,60.071 ; L4.2 127.404,60.071
  Bottom Layer w0.3: v2(98.171,59.69) v2(111.379,59.69)
AGND: C19.1 C20.1 C34.1 C35.2 C38.1 C39.1 L6.2 R5.1 R15.2 R20.2 U1.30 U3.2 U5.11 | length 135.7
  Top Layer w0.3: U1.30 v2(96.612,55.28)
  Top Layer w0.5: R20.2@107.632,44.155 107.696,44.092 R20.2 107.696,42.164 111.252,38.608 111.506,38.608 114.601,35.513 121.272,35.513 122.908,37.15 C19.1 123.212,37.299 124.548,37.299 129.157,41.908 129.157,49.274 ; U5.11 123.532,47.752 ; R15.2 123.532,46.648 123.532,47.752 ; C38.1 129.157,49.274 ; 123.532,47.752 127.635,47.752 129.157,49.274
  Top Layer w1: R5.1 U3.2 105.306,62.634 105.306,64.285 105.664,64.643 ; C20.1 C20.1@107.568,48.034 ; C39.1 107.632,55.944 107.632,44.155 101.092,50.696 v2(101.092,54.356) 101.092,62.992 102.743,64.643 105.664,64.643 ; L6.2 127.658,64.643 126.134,63.119 C34.1 120.538,63.119 119.761,63.896 C35.2 105.664,64.643
  Bottom Layer w0.3: v2(96.612,55.28) 100.168,55.28 v2(101.092,54.356)
GND: C1.1 C5.1 C6.1 C7.1 C8.1 C9.1 C10.1 C11.1 C12.1 C21.2 C22.1 C23.1 C24.1 C25.1 C26.1 D2.1 J2.4 J2.5 J2.6 P1.4 P1.6 P1.8 P1.10 P1.12 P1.14 P1.16 P1.18 P1.20 R7.1 R9.1 R16.2 S1.1 U1.16 U1.38 U1.51 U1.61 U1.71 U1.83 U1.94 U1.107 U1.120 U1.130 U1.143 U4.3 U7.1 | length 464.8
  Top Layer w0.3: J2.5 53.48,61.722 C25.1 57.404,61.595 C26.1 ; C1.1 59.436,42.545 60.701,41.28 U1.107 67.442,41.28 v1(69.215,43.053) ; C10.1@63.163,52.788 C10.1 62.805,53.28 U1.83 68.647,53.28 v1(69.596,54.229) ; U1.94 68.862,47.78 v1(69.977,48.895) ; U1.71 68.077,59.05 70.485,56.642 v2(71.247,56.642) ; C9.1 72.688,35.985 72.688,37.076 73.077,37.465 U1.120 73.077,41.858 v1(72.263,42.672) ; v1(74.676,56.261) 73.077,57.86 U1.61 73.077,61.037 74.397,62.357 74.397,63.475 C7.1 ; v1(77.343,42.545) 78.077,41.811 U1.130 78.077,37.77 78.022,37.715 78.022,35.731 R7.1 ; R7.1@77.597,35.156 77.825,34.928 77.825,33.935 78.001,33.759 82.423,33.759 84.328,35.664 C8.1 84.577,36.063 U1.143 ; C6.1 79.121,62.081 78.077,61.037 U1.51 78.077,58.194 v1(79.756,56.515) ; v1(81.534,46.609) 83.205,48.28 U1.16 ; v1(83.439,54.356) 84.577,55.494 U1.38 84.577,61.037 85.135,61.595 90.297,61.595 91.567,62.865 C5.1 99.441,63.373 ; C11.1 C11.1@98.596,43.732
  Top Layer w0.5: J2.5 45.55,74.295 ; J2.6 45.55,74.295 ; J2.4 48.133,74.295 45.55,74.295 ; P1.20 P1.18 P1.16 P1.14 P1.12 P1.10 P1.8 ; P1.4 P1.6 P1.8 ; S1.1 55.245,52.693 54.495,51.943 P1.8 ; C21.2 64.643,80.518 v1(64.77,80.391) v1(65.532,79.629) 66.675,78.486 66.675,77.774 66.725,77.724 U7.1 ; R7.1@77.597,35.156 R7.1
  Top Layer w1: C9.1@72.263,35.41 C9.1 ; C22.1 C23.1 78.128,74.168 78.966,73.33 78.966,73.303 79.121,73.148 ; C6.1 79.121,73.148 ; C24.1 78.994,74.168 79.121,74.041 79.121,73.148 ; U4.3 80.768,71.501 79.121,73.148 ; C12.1 98.171,49.807 98.246,49.882 99.246,49.882 99.441,50.077 ; C11.1@98.596,43.732 99.441,44.577 99.441,50.077 ; 101.854,83.423 101.854,79.375 99.441,76.962 99.441,63.373 99.441,50.077 ; R16.2 v1(126.238,51.943)
  Top Layer w2: 101.854,83.423 v1(100.584,83.423) 102.759,85.598 109.576,85.598 115.57,85.598 D2.1
  Bottom Layer w0.5: J2.5 43.307,67.409 43.307,34.964 43.6,34.671 47.371,34.671 P1.20 ; P1.4 66.802,57.023 v1(69.596,54.229)
  Bottom Layer w1: v1(64.77,80.391) v1(65.532,79.629) 68.707,76.454 75.565,76.454 80.518,71.501 U4.3 ; 115.189,83.185 118.11,80.264 118.11,60.071 v1(126.238,51.943)
  Bottom Layer w2: v1(69.215,43.053) 71.882,43.053 v1(72.263,42.672) 77.216,42.672 v1(77.343,42.545) 81.407,42.545 81.788,42.164 81.788,46.355 v1(81.534,46.609) 83.439,48.514 v1(83.439,54.356) 81.28,56.515 v1(79.756,56.515) 74.93,56.515 v1(74.676,56.261) 71.628,56.261 v1(69.596,54.229) 69.596,49.276 v1(69.977,48.895) ; 83.185,56.515 98.171,71.501 98.171,75.692 101.727,79.248 R9.1 101.727,83.693
  other v1: 103.581,83.423 106.578,83.423 109.576,83.423 112.573,83.423 115.57,83.423 100.584,84.963 103.581,84.963 106.578,84.963 109.576,84.963 112.573,84.963 115.57,84.963 100.584,86.36 103.581,86.36 106.578,86.36 109.576,86.36 112.573,86.36 115.57,86.36
JTCK: P1.9 U1.109 | length 28
  Top Layer w0.3: v2(63.881,38.862) 67.577,38.862 U1.109
  Bottom Layer w0.3: P1.9 48.133,48.133 57.428,48.133 58.886,46.675 58.886,41.825 60.96,39.751 61.849,38.862 v2(63.881,38.862)
JTDI: P1.5 U1.110 | length 37
  Top Layer w0.3: v2(68.072,36.576) 68.077,36.581 U1.110
  Bottom Layer w0.3: P1.5 48.001,53.345 60.963,53.345 65.667,48.641 65.667,38.401 67.492,36.576 v2(68.072,36.576)
JTDO: P1.13 U1.133 | length 43.7
  Top Layer w0.3: U1.133 79.577,37.644 v2(81.09,36.131)
  Bottom Layer w0.3: P1.13 48.133,43.053 51.562,43.053 53.213,44.704 57.023,44.704 58.386,43.341 58.386,41.563 64.008,35.941 69.85,35.941 70.04,36.131 v2(81.09,36.131)
JTMS: P1.7 U1.105 | length 26.2
  Top Layer w0.3: v2(63.87,42.28) U1.105
  Bottom Layer w0.3: P1.7 48.133,50.673 58.436,50.673 59.452,49.657 59.452,44.053 61.225,42.28 v2(63.87,42.28)
JTRST: P1.3 U1.134 | length 50.8
  Top Layer w0.3: U1.134 80.077,38.023 80.889,37.211 v2(80.899,37.211)
  Bottom Layer w0.3: P1.3 48.101,55.785 60.039,55.785 66.167,49.657 66.167,38.608 67.564,37.211 v2(80.899,37.211)
NetC4_1: C4.1 R5.2 U1.31 | length 35.8
  Top Layer w0.3: U1.31 94.134,55.78 95.118,56.764 C4.1 96.52,57.531 v2(97.536,56.515)
  Top Layer w1: R5.2 v1(112.776,62.484)
  Bottom Layer w0.3: v2(97.536,56.515) 110.49,56.515 112.776,58.801 v1(112.776,62.484)
NetC4_2: C4.2 R4.2 U1.32 U3.1 U5.3 | length 44.4
  Top Layer w0.3: U1.32 91.967,56.28 92.618,56.931 92.718,56.931 93.218,57.431 C4.2 93.718,58.031 93.718,58.666 94.107,59.055 96.774,59.055 v2(97.79,58.039)
  Top Layer w0.5: U3.1 105.506,60.584 105.99,60.1 107.159,60.1 R4.2 107.315,58.293 107.823,57.785 114.3,57.785 115.367,56.718 115.367,50.038 114.351,49.022 U5.3
  Bottom Layer w0.3: v2(97.79,58.039) 107.442,58.039 v2@107.569,58.166
  other v2: 107.505,58.102
NetC11_2: C11.2 R6.1 U1.23 Y2.1 | length 17.5
  Top Layer w0.3: U1.23 87.834,51.78 89.916,49.698 89.916,46.228 Y2.1 96.139,43.815 C11.2 96.647,43.561 R6.1
NetC12_2: C12.2 R6.2 U1.24 Y2.2 | length 13.5
  Top Layer w0.3: U1.24 88.944,52.28 Y2.2 92.519,48.895 93.281,49.657 C12.2 96.647,49.403 R6.2
NetC13_1: C13.1 D1.2 U4.8 | length 9.4
  Top Layer w1: C13.1 88.888,81.788 D1.2 ; D1.2@90.043,80.518 90.043,77.732 91.059,76.716 U4.8
NetC13_2: C13.2 D2.2 L3.1 Q1.2 Q1.3 Q1.5 Q1.6 Q1.7 U4.6 | length 61
  Top Layer w1: C13.2 84.732,80.01 88.392,76.35 88.392,72.39 89.185,71.597 U4.6@90.963,71.597 ; U4.6 U4.6@90.963,71.597 ; 124.206,88.392 98.679,88.392 97.663,87.376 97.663,72.817 96.442,71.597 U4.6@90.963,71.597
NetC19_2: C19.2 R12.2 U1.34 | length 60.2
  Top Layer w0.3: U1.34 89.157,57.28 92.165,60.288 96.737,60.288 v2(97.282,60.833)
  Top Layer w0.5: R12.2 120.21,38.93 C19.2
  Bottom Layer w0.3: v2(97.282,60.833) 106.934,60.833 109.855,63.754 113.284,63.754 114.3,62.738 114.3,46.228 v2(121.539,38.989)
NetC21_1: C21.1 U7.4 | length 7.8
  Top Layer w0.5: C21.1 62.634,78.74 64.897,76.477 64.897,74.549 65.482,73.964 67.098,73.964 U7.4
NetC25_2: C25.2 U7.7 Y3.1 | length 16
  Top Layer w0.3: 57.15,68.072 59.309,70.231 67.021,70.231 U7.7 ; C25.2 57.404,63.627 Y3.1 57.404,68.453
NetC26_2: C26.2 U7.8 Y3.2 | length 9.2
  Top Layer w0.3: C26.2 62.484,63.754 Y3.2 64.389,68.834 U7.8
NetC27_1: C27.1 C28.1 C29.1 C30.1 C31.2 C32.1 C33.2 C37.2 D3.1 J3.2 L6.1 LED1.2 R23.1 U8.3 U8.5 U9.1 | length 229.6
  Top Layer w1: 51.054,90.678 D3.1@51.168,90.678 ; LED1.2 52.019,90.67 52.011,90.678 D3.1@51.168,90.678 ; D3.1 D3.1@52.565,92.075 ; 65.532,101.981 65.561,102.01 U8.5@65.561,106.312 ; R23.1 84.328,84.836 84.201,84.709 ; C31.2@91.96,98.679 91.96,99.438 92.444,99.922 93.203,99.922 94.754,101.473 C29.1 98.742,101.409 101.155,101.409 C30.1 ; C31.2 92.202,98.044 93.472,96.774 93.472,86.741 91.44,84.709 84.201,84.709 ; C33.2@115.975,102.084 C33.2 ; L6.1 136.779,64.643 v1(137.16,65.024) ; D3.1@51.168,90.678 D3.1@52.565,92.075 ; D3.1@52.565,92.075 53.462,91.178 53.97,91.178 58.026,87.122 75.946,87.122 78.359,84.709 84.201,84.709
  Bottom Layer w1: 136.652,61.595 140.716,61.595
  Bottom Layer w2: v1(115.951,107.188) 126.111,97.028 126.111,72.136 136.652,61.595
  Bottom Layer w3: J3.2 53.081,98.429 53.081,103.246 60.53,110.695 108.126,110.695 111.379,107.442 v1(113.538,105.283)
  other v1: 137.16,58.928 139.192,58.928 141.224,58.928 143.256,58.928 137.16,60.198 139.192,60.198 141.224,60.198 143.256,60.198 137.16,61.849 139.192,61.849 141.224,61.849 143.256,61.849 137.16,63.5 139.192,63.5 141.224,63.5 143.256,63.5 139.192,65.024 141.224,65.024 143.256,65.024 113.665,103.251 115.951,105.283 111.125,105.41 108.966,107.188 111.125,107.188 113.411,107.188
NetC38_2: C38.2 R24.2 U1.35 | length 57.5
  Top Layer w0.3: U1.35 88.95,57.78 92.13,60.96 95.631,60.96 v2(96.647,61.976)
  Top Layer w0.5: v2(117.602,56.134) 118.745,57.277 128.428,57.277 130.311,55.394 130.311,55.386 131.064,54.633 R24.2 131.064,51.943 C38.2
  Bottom Layer w0.3: v2(96.647,61.976) 104.648,61.976 107.188,64.516 113.61,64.516 114.935,63.191 114.935,58.801 v2(117.602,56.134)
NetC39_2: C39.2 R18.1 U5.1 U5.2 | length 9.7
  Top Layer w0.5: 110.43,55.88 110.43,53.883 112.751,51.562 U5.1 U5.2
  Top Layer w1: C39.2 109.349,55.96 109.429,55.88 110.43,55.88 111.431,55.88 111.506,55.805 R18.1
NetD3_2: D3.2 L5.1 U8.2 | length 45.7
  Top Layer w1: D3.2 59.702,92.075 60.599,91.178 60.599,90.15 61.722,89.027 74.676,89.027 79.072,93.423 81.104,93.423 81.788,94.107 80.129,95.766 80.129,97.417 75.565,101.981 71.628,101.981 70.686,102.923 70.686,106.287 U8.2@70.661,106.312
NetF1_1: F1.1 J2.1 | length 19.2
  Top Layer w1: F1.1@55.946,76.84 55.951,76.835 v1(60.071,76.835) v1@61.468,75.438
  Bottom Layer w1: J2.1 53.467,74.422 55.88,76.835 v1(60.071,76.835) v1(61.722,75.184)
  other v1: 60.896,76.01
NetJ2_2: J2.2 U7.6 | length 19.2
  Top Layer w0.3: J2.2 50.509,76.673 51.47,76.673 56.769,71.374 U7.6
NetJ2_3: J2.3 U7.5 | length 22.9
  Top Layer w0.3: J2.3 48.26,78.232 48.768,78.74 50.927,78.74 57.023,72.644 U7.5
NetL1_2: L1.2 R1.2 | length 3
  Top Layer w0.3: R1.2 104.267,38.354 L1.2
NetL2_2: L2.2 R2.2 | length 2.8
  Top Layer w0.3: R2.2 L2.2
NetLED1_1: LED1.1 R22.1 | length 3.3
  Top Layer w0.3: LED1.1 54.153,86.817 55.455,85.515 55.455,84.753 R22.1
NetQ1_1: Q1.1 R8.2 | length 42.3
  Top Layer w1: R8.2 95.504,88.519 97.536,90.551 121.641,90.551 121.666,90.576 Q1.1
NetR1_1: R1.1 U1.139 | length 24
  Top Layer w0.3: U1.139 82.577,36.295 v2(82.931,35.941) ; v2(91.313,36.83) 98.679,36.83 100.33,38.481 R1.1
  Bottom Layer w0.3: v2(82.931,35.941) 91.059,35.941 91.275,36.157 91.275,36.792 v2(91.313,36.83)
NetR2_1: R2.1 U1.140 | length 21.5
  Top Layer w0.3: U1.140 83.077,37.827 83.566,37.338 v2(83.82,37.338) ; v2(92.964,36.068) 102.108,36.068 R2.1
  Bottom Layer w0.3: v2(83.82,37.338) 87.692,37.338 87.784,37.43 91.602,37.43 v2(92.964,36.068)
NetR7_2: R7.2 U1.138 | length 5.8
  Top Layer w0.3: R7.2 81.153,35.306 82.077,36.23 U1.138
NetR8_1: R8.1 U4.7 | length 2.7
  Top Layer w1: U4.7 91.123,74.105 93.662,74.105 R8.1
NetR10_1: R10.1 R11.1 U5.9 | length 14.3
  Top Layer w0.5: R10.1 116.713,39.243 116.713,44.374 117.551,45.212 U5.9 118.37,45.193 119.78,45.193 120.269,44.704 120.269,42.545 121.285,41.529 R11.1
NetR10_2: R10.2 R12.1 U5.8 | length 11.1
  Top Layer w0.5: U5.8 118.618,43.675 118.618,37.846 118.181,37.409 117.419,37.409 R10.2 R12.1
NetR13_1: R13.1 R15.1 U5.10 | length 6.2
  Top Layer w0.5: U5.10 118.37,46.463 121.939,46.463 R15.1 122.111,46.291 122.111,44.005 R13.1
NetR14_1: R14.1 R24.1 U5.14 | length 16.8
  Top Layer w0.5: U5.14 118.351,55.232 119.253,56.134 123.444,56.134 123.698,55.88 R14.1 123.825,54.356 129.159,54.356 R24.1
NetR14_2: R14.2 R16.1 U5.13 | length 6.5
  Top Layer w0.5: U5.13 118.37,50.311 119.78,50.311 121.158,51.689 121.666,51.689 R16.1 R14.2
NetR17_1: R17.1 R19.2 U5.12 | length 14.1
  Top Layer w0.5: R19.2 114.935,40.79 115.824,41.679 115.824,47.295 117.551,49.022 U5.12 121.562,49.022 121.92,49.38 R17.1
NetR18_2: R18.2 R20.1 U5.5 | length 18.1
  Top Layer w0.5: R20.1 109.799,44.267 v2(109.799,45.791) 110.49,46.482 U5.5 ; v2(112.776,53.721) 113.411,54.356 113.411,55.626 R18.2
  Bottom Layer w0.5: v2(109.799,45.791) 109.799,51.633 111.887,53.721 v2(112.776,53.721)
NetR19_1: R19.1 U5.6 U5.7 | length 4.9
  Top Layer w0.5: R19.1 113.157,43.896 113.203,43.942 U5.7 U5.6
NetR21_1: R21.1 R23.2 U8.4 | length 36.2
  Top Layer w1: U8.4@67.261,106.312 67.261,108.155 v1(67.31,108.204) ; R21.1 80.454,89.471 R23.2@82.486,89.471 ; v1(81.661,86.995) 82.475,87.809 82.475,89.46 R23.2@82.486,89.471 ; R23.2 R23.2@82.486,89.471
  Bottom Layer w1: v1(67.31,108.204) 67.31,97.79 78.105,86.995 v1(81.661,86.995)
NetU1_42: U1.42 U4.2 | length 16
  Top Layer w0.3: U1.42 82.577,62.384 85.471,65.278 85.471,72.009 U4.2
PA9: U1.101 U7.3 | length 41.9
  Top Layer w0.3: U1.101 62.146,44.28 59.817,46.609 59.817,55.499 69.85,65.532 69.85,74.422 69.088,75.184 U7.3
PA10: U1.102 U7.2 | length 44.4
  Top Layer w0.3: v1(62.23,43.18) 62.232,43.18 62.832,43.78 U1.102 ; v1(62.23,45.847) 60.706,47.371 60.706,55.626 70.358,65.278 70.358,75.438 69.342,76.454 U7.2
  Bottom Layer w0.3: v1(62.23,45.847) 62.23,43.307 v1@62.357,43.18
RESET: C1.2 P1.15 R3.2 S1.2 U1.25 | length 92.5
  Top Layer w0.3: C1.2 v2(55.118,43.942) 55.118,45.578 S1.2 ; U1.25 89.483,52.78 90.678,53.975 v2(96.266,53.975) ; R3.2@93.091,38.354 94.488,38.354 v2(94.996,37.846)
  Bottom Layer w0.3: P1.15 48.133,40.513 51.816,40.513 53.721,42.418 55.245,42.418 ; v2(55.118,43.942) 55.118,42.545 55.245,42.418 ; v2(96.266,53.975) 98.044,53.975 100.584,51.435 100.584,42.734 95.696,37.846 v2(94.996,37.846) 94.996,37.084 93.091,35.179 64.008,35.179 56.769,42.418 55.245,42.418
VCC: C27.2 C28.2 C37.1 J3.1 Q1.8 U8.1 | length 1.1
  Top Layer w0.254: C37.1 C37.1@58.42,104.775
Vout+: C14.1 C15.2 C16.1 C17.1 C18.1 J1.2 L3.2 R13.2 | length 45.3
  Top Layer w0.5: R13.2 125.984,43.942 v1(127.127,45.085)
  Bottom Layer w0.5: v1(109.474,79.375) 116.017,72.832 116.017,59.243 127.127,48.133 v1(127.127,45.085)
Vout-: C14.2 C15.1 C16.2 C17.2 C18.2 J1.1 R9.2 R11.2 R17.2 | length 40.1
  Top Layer w0.5: R17.2 127.381,49.53 v1(127.889,50.038) ; R11.2 127.254,41.529 v1(128.143,42.418)
  Bottom Layer w0.5: v2(120.015,70.231) 120.015,66.167 127.889,58.293 v1(127.889,50.038) 127.889,49.957 128.143,49.703 v1(128.143,42.418)
pads on no net: P1.11 P1.17 P1.19 U1.1 U1.2 U1.3 U1.4 U1.5 U1.7 U1.8 U1.9 U1.10 U1.11 U1.12 U1.13 U1.14 U1.15 U1.18 U1.19 U1.20 U1.21 U1.22 U1.26 U1.27 U1.28 U1.29 U1.36 U1.37 U1.40 U1.41 U1.43 U1.44 U1.45 U1.46 U1.47 U1.48 U1.49 U1.50 U1.53 U1.54 U1.55 U1.56 U1.57 U1.58 U1.59 U1.60 U1.63 U1.64 U1.65 U1.66 U1.67 U1.68 U1.69 U1.70 U1.73 U1.74 U1.75 U1.76 U1.77 U1.78 U1.79 U1.80 U1.81 U1.82 U1.85 U1.86 U1.87 U1.88 U1.89 U1.90 U1.91 U1.92 U1.93 U1.96 U1.97 U1.98 U1.99 U1.100 U1.103 U1.104 U1.106 U1.111 U1.112 U1.113 U1.114 U1.115 U1.116 U1.117 U1.118 U1.119 U1.122 U1.123 U1.124 U1.125 U1.126 U1.127 U1.128 U1.129 U1.132 U1.135 U1.136 U1.137 U1.141 U1.142 U3.3 U4.4 U4.5 U7.9 U7.10 U7.11 U7.12 U7.13 U7.14 U7.15 U8.0

## Polygon pours and split planes (outlines as drawn)
VCC on Top Layer "Top Layer-VCC" (solid, pour order 2): 41.402,97.282 41.402,104.013 41.275,104.14 41.529,104.394 52.07,104.394 60.198,112.522 127.381,112.522 130.81,109.093 130.81,96.393 120.269,96.393 120.142,96.52 120.142,107.442 117.856,109.728 63.627,109.728 59.055,105.156 59.055,102.108 56.896,102.108 56.388,101.6 49.022,101.6 47.752,100.33 47.752,97.282
no net on Top Layer "Top Layer-No Net" (solid, pour order 0): 45.847,112.522
GND on Bottom Layer "Bottom Layer-GND" (solid, remove dead copper, pour order 8): 119.38,86.995 119.253,87.122 56.388,87.122 50.8,81.534 41.529,81.534 41.529,33.02 41.402,32.893 41.529,32.766 48.26,32.766 51.181,35.687 51.181,39.624 53.213,41.656 57.785,41.656 66.04,33.401 125.476,33.401 139.446,47.371 146.05,47.371 146.05,86.868
GND on Bottom Layer "Bottom Layer-GND 1" (solid, pour order 6): 99.695,87.122

## Keep-outs
Keep-Out Layer:
  lines w0.254: 41.402,32.893 41.402,112.395 41.529,112.522 46.99,112.522 140.208,112.522 146.05,106.68 146.05,38.481 140.335,32.766 41.529,32.766 41.402,32.893

## Other copper
Top Layer:
  region net 3.3V: 79.883,54.61 71.247,54.61 71.247,44.704 79.883,44.704
  rectangle net 3.3V: 136.017,48.133 144.018,56.134
  rectangle net NetC27_1: 136.017,58.166 144.018,66.167
  rectangle net 10V: 85.979,87.122 91.313,93.726
  rectangle net 10V: 85.979,90.932 89.027,103.378
  rectangle net GND: 99.568,82.423 119.634,87.122
  rectangle net 3.3V: 98.044,92.456 117.221,98.933
  rectangle net NetC27_1: 60.452,98.171 62.357,102.489
  rectangle net NetC27_1: 60.452,100.203 69.596,102.489
  rectangle net NetC27_1: 68.453,101.092 69.596,107.569
  rectangle net NetC27_1: 59.817,98.171 62.357,100.203
  rectangle net VCC: 71.755,103.759 74.422,110.871
  rectangle net NetC27_1: 41.91,89.789 53.086,94.869
  rectangle net NetC27_1: 50.165,90.17 54.991,98.933
  rectangle net NetC27_1: 50.165,96.647 62.357,100.203
  rectangle net NetC27_1: 108.077,101.727 117.602,108.077
  rectangle net NetC13_2: 123.698,83.566 126.873,91.313
  rectangle net Vout-: 100.838,68.453 145.542,74.422
  rectangle net Vout+: 105.41,75.819 145.669,80.518
  rectangle net Vout+: 139.319,76.835 145.669,105.283
  rectangle net NetC13_2: 131.953,89.281 136.906,105.283
  rectangle net NetC13_2: 122.428,89.281 135.89,93.599
  rectangle net 10V: 79.629,102.616 105.029,108.839
Bottom Layer:
  region net GND: 84.709,58.039 67.818,58.039 67.818,40.513 84.709,40.513
  rectangle net 3.3V: 136.017,48.133 144.018,56.261
  rectangle net NetC27_1: 136.017,58.166 144.018,66.294
  rectangle net GND: 99.695,82.55 119.634,87.122
  rectangle net 10V: 79.629,102.743 104.775,108.458
  rectangle net 3.3V: 98.044,92.456 117.221,98.933
  rectangle net NetC27_1: 108.077,101.727 117.602,108.077

## Silkscreen, mask and mechanical layers (free items; w line width, h text height)
Top Overlay:
  text "Input+" at 42.164,104.902 h1.52
  text "OUT+" at 137.922,86.106 h1.52
  text "Input-" at 41.91,84.582 h1.52
  text "OUT-" at 138.303,64.643 h1.52
  text "Reset" at 58.293,47.117 h1.52
  text "PB8" at 102.616,40.259 h1.52
  text "PB9" at 110.744,33.401 h1.52

## Text inside footprints (layer, text, board x,y; h text height)
C1: Mechanical 15 "1" at 56.171,42.995 h0.91 r180
C5: Mechanical 15 "1" at 90.842,63.823 h0.91 r180
C6: Mechanical 15 "1" at 78.396,64.204 h0.91 r180
C7: Mechanical 15 "1" at 73.951,64.204 h0.91 r180
C8: Mechanical 15 "1" at 85.053,35.364 h0.91
C9: Mechanical 15 "1" at 72.988,35.11 h0.91
C10: Mechanical 15 "1" at 62.288,52.488 h0.91 r270
C11: Mechanical 15 "1" at 97.573,43.884 h0.91 r180
C12: Mechanical 15 "1" at 97.446,50.107 h0.91 r180
C13: Mechanical 15 "1" at 84.132,81.063 h0.91 r270
C21: Mechanical 15 "1" at 62.934,79.465 h0.91 r90
C22: Mechanical 15 "1" at 75.761,74.893 h0.91 r90
C23: Mechanical 15 "1" at 78.428,74.893 h0.91 r90
C24: Mechanical 15 "1" at 80.841,74.893 h0.91 r90
C25: Mechanical 15 "1" at 57.727,62.447 h0.91 r90
C26: Mechanical 15 "1" at 63.315,62.32 h0.91 r90
C27: Mechanical 15 "1" at 51.504,100.42 h0.91 r90
C28: Mechanical 15 "1" at 53.917,100.42 h0.91 r90
C29: Mechanical 15 "1" at 99.129,102.198 h0.91 r90
C30: Mechanical 15 "1" at 101.669,102.071 h0.91 r90
C32: Mechanical 15 "1" at 110.929,101.256 h0.91 r270
C34: Mechanical 15 "1" at 125.534,62.394 h0.91 r270
J2: Mechanical 1 "PCB Edge" at 35.575,81.324 h0.25 r270
R1: Mechanical 15 "1" at 103.087,38.031 h0.91
R2: Mechanical 15 "1" at 103.214,35.237 h0.91
R3: Mechanical 15 "1" at 92.038,38.539 h0.91
R4: Mechanical 15 "1" at 108.368,60.394 h0.91 r180
R5: Mechanical 15 "1" at 108.04,62.034 h0.91
R6: Mechanical 15 "1" at 97.097,46.445 h0.91 r90
R7: Mechanical 15 "1" at 78.322,34.856 h0.91
R8: Mechanical 15 "1" at 94.451,73.718 h0.91
R10: Mechanical 15 "1" at 116.644,38.137 h0.91 r270
R11: Mechanical 15 "1" at 122.899,41.079 h0.91
R12: Mechanical 15 "1" at 120.592,37.809 h0.91 r90
R13: Mechanical 15 "1" at 122.899,43.492 h0.91
R14: Mechanical 15 "1" at 122.973,54.679 h0.91 r180
R15: Mechanical 15 "1" at 122.772,45.905 h0.91
R16: Mechanical 15 "1" at 122.645,51.493 h0.91
R17: Mechanical 15 "1" at 122.645,49.08 h0.91
R18: Mechanical 15 "1" at 112.231,55.303 h0.91
R19: Mechanical 15 "1" at 113.882,40.19 h0.91
R20: Mechanical 15 "1" at 108.749,44.392 h0.91 r180
R21: Mechanical 15 "1" at 79.666,89.858 h0.91 r180
R22: Mechanical 15 "1" at 56.605,83.878 h0.91
R23: Mechanical 15 "1" at 83.603,89.985 h0.91 r180
R24: Mechanical 15 "1" at 130.011,54.033 h0.91